# Altium PCB tuch-tara-btr.PcbDoc
Units mm, origin at the board's own origin, x right, y up, seen from the top; angles counter-clockwise.
Board outline 151 x 86.38 mm, 2 copper layers (Top Layer, Bottom Layer); 17 components, 13 nets, 42 pads, 0 vias.
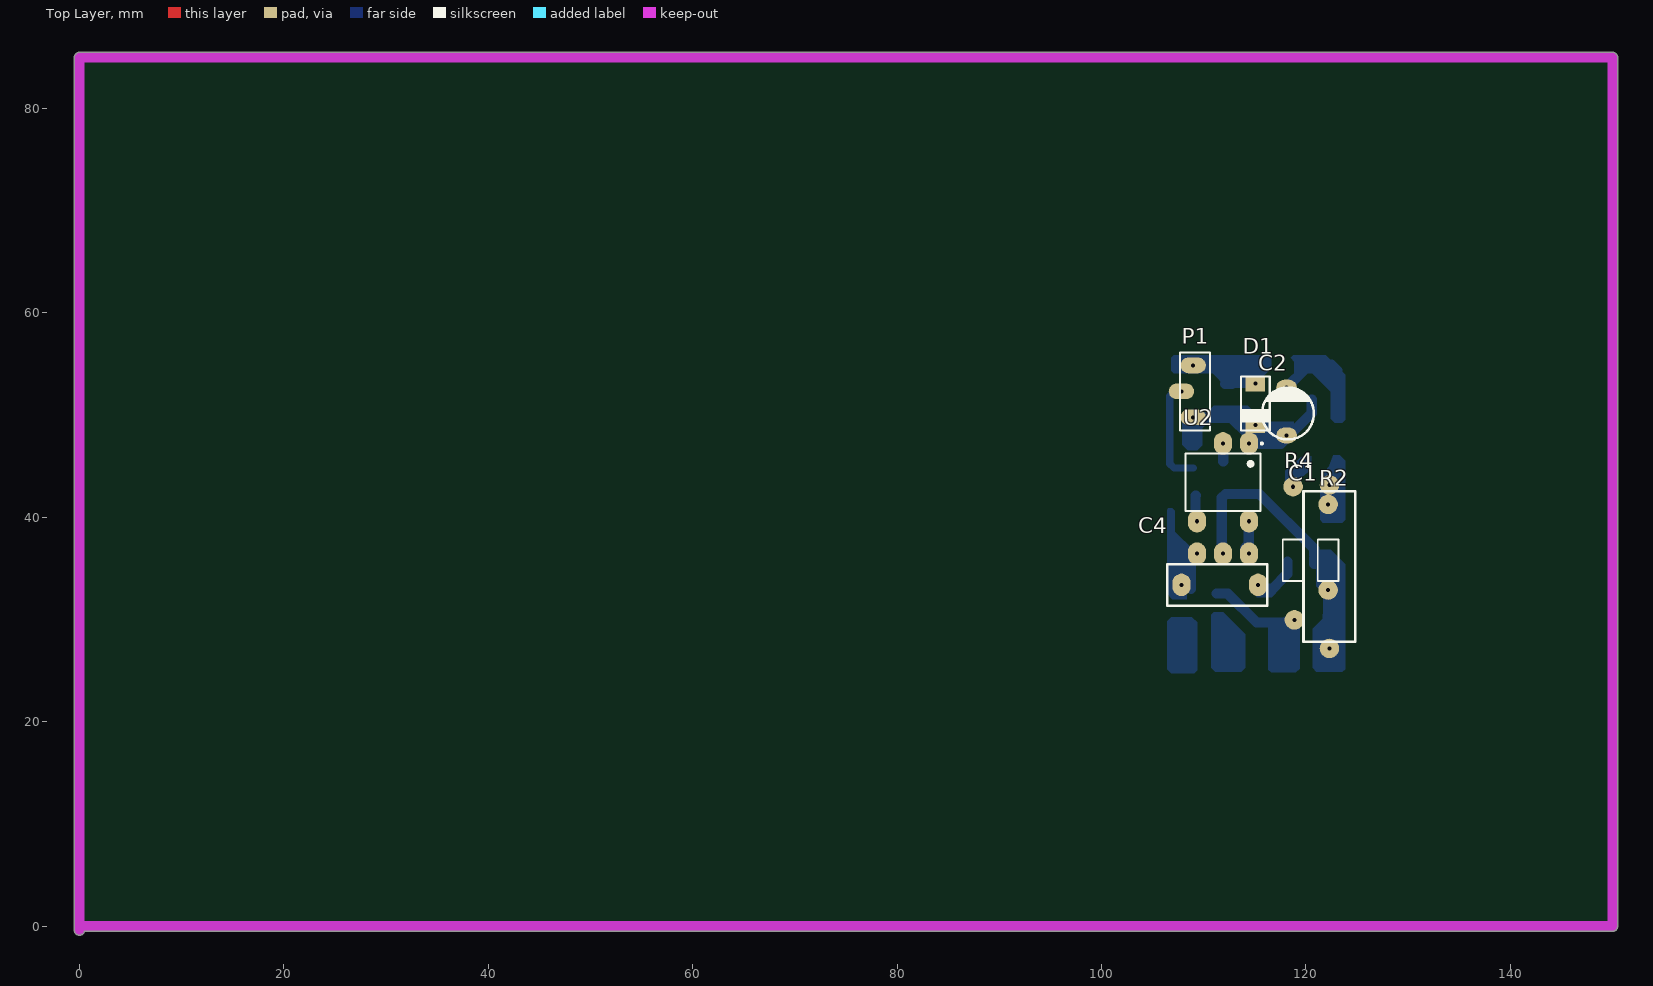
[diagram p0: Top Layer view]
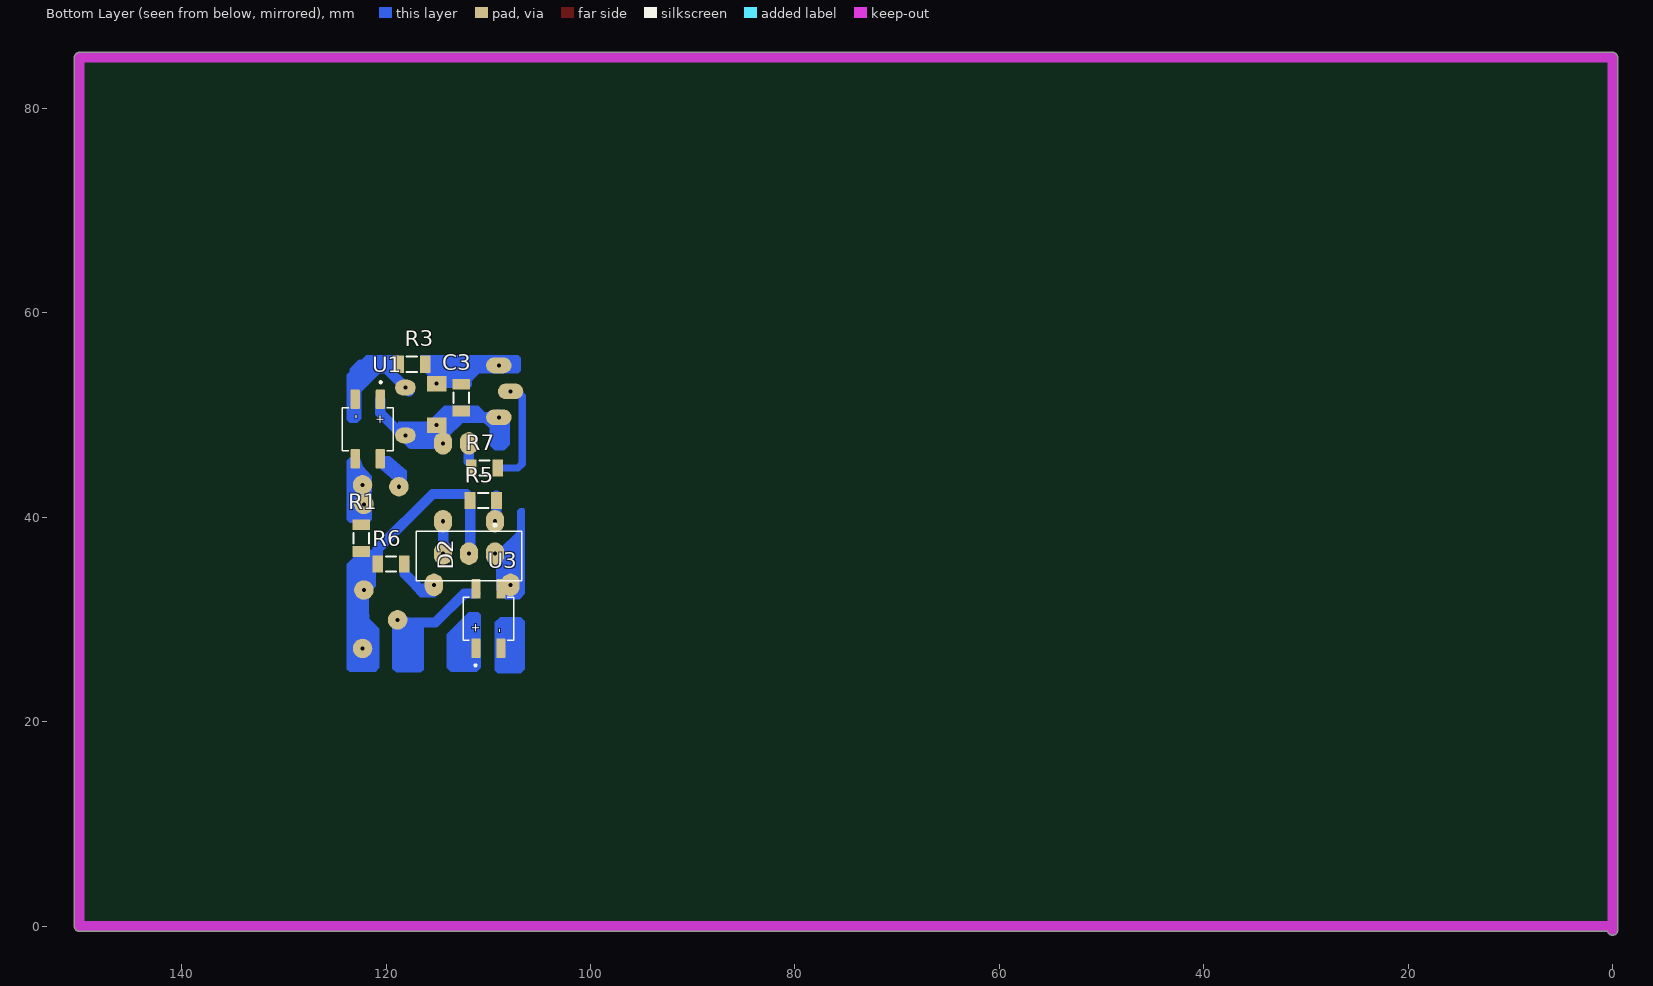
[diagram p1: Bottom Layer view, seen from below]
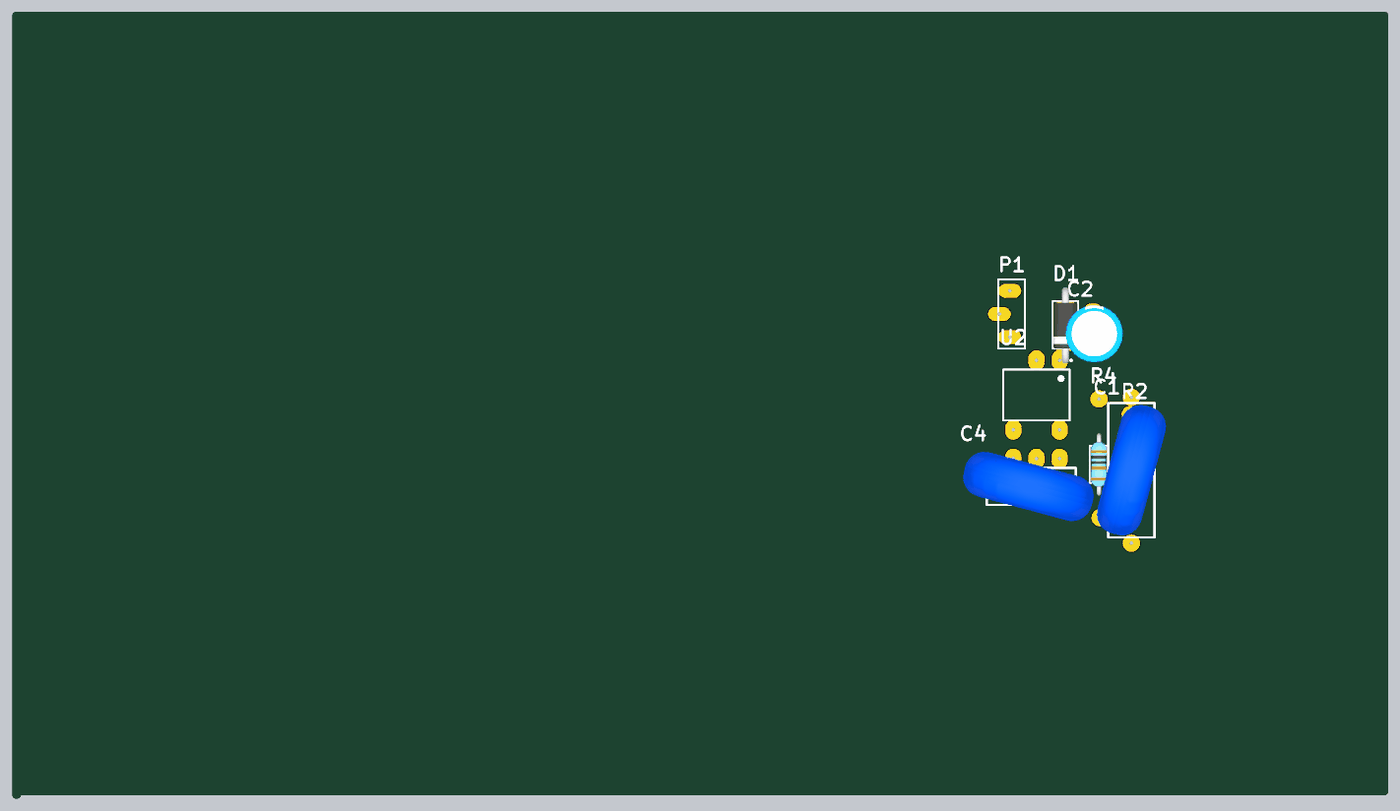
[diagram p2: 3D render of the assembled board from above, using the file's embedded part models]
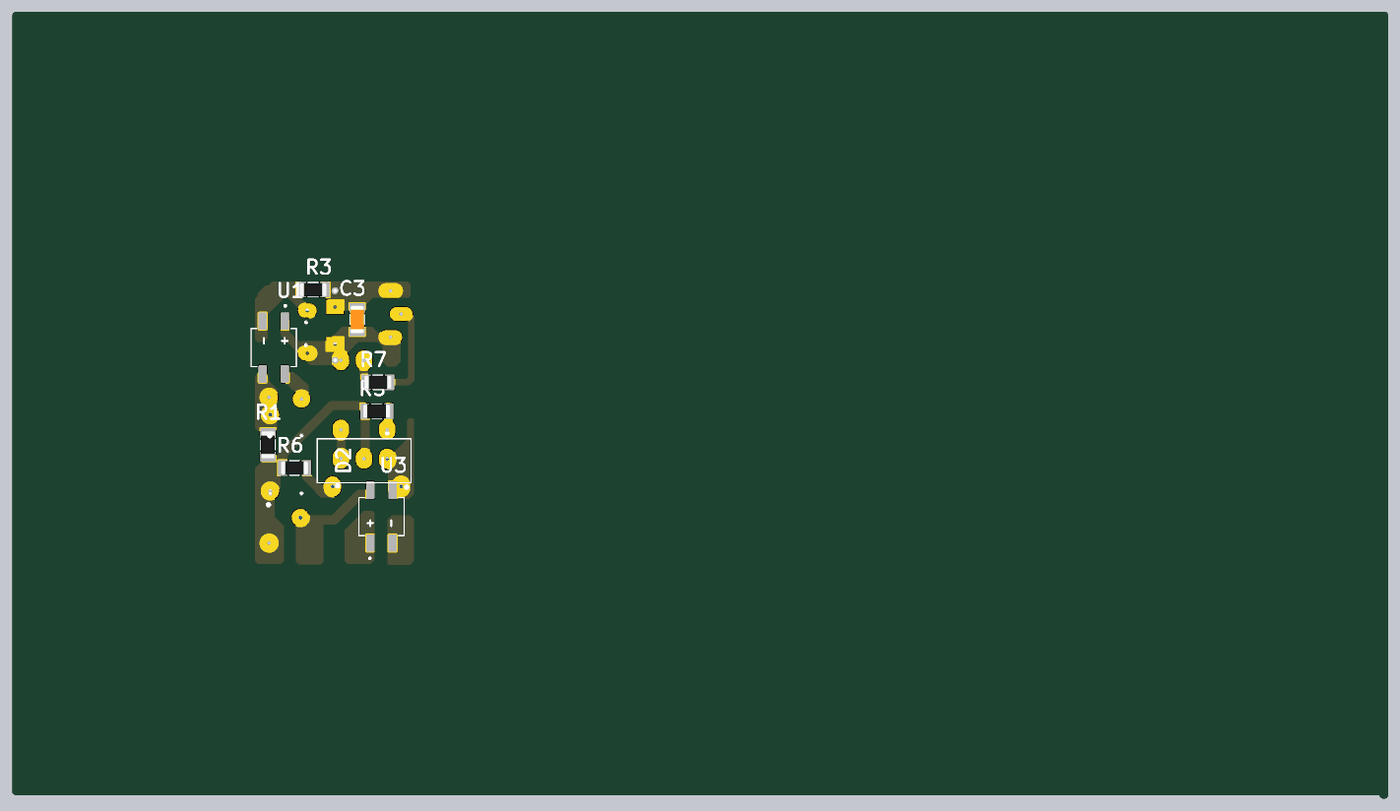
[diagram p3: 3D render of the assembled board from below, using the file's embedded part models]

## Layer stack, top to bottom
Top Solder: solder mask 0.0102, Solder Resist, Dk 3.5
Top Layer: signal copper 0.0356
Dielectric 1: dielectric 0.32, FR-4, Dk 4.8
Bottom Layer: signal copper 0.0356
Bottom Solder: solder mask 0.0102, Solder Resist, Dk 3.5

## Board outline
-0.5,-0.381 -0.5,85 cw(c0,85) 0,85.5 150,85.5 cw(c150,85) 150.5,85 150.5,0 cw(c150,0) 150,-0.5 0.486,-0.5 cw(c0,-0.381)

## Design rules (kind name [scope] priority, off if disabled: settings)
Clearance Clearance_1 [InPolygon] p1: gap=0.8 ignorepadtopadclearanceinfootprint=FALSE
Clearance [All] p2: gap=0.254 ignorepadtopadclearanceinfootprint=FALSE except(0: Arc-Hole Track-Hole SMDPad-Hole THPad-Hole Via-Hole Fill-Hole Poly-Hole Region-Hole Text-Hole)
PolygonConnect [All] p1: connectstyle=Relief reliefconductorwidth=0.254 reliefentries=4 polygonreliefangle="90 Angle" airgapwidth=0.254
RoomDefinition tuch-tara2 [InComponentClass('tuch-tara2')] p1: confinementstyle=ConfineIn formatcopy=TRUE lockcomponents=FALSE outline 144.907,-4.953 247.904,-4.953 247.904,23.114 144.907,23.114
RoutingLayers [All] p1: top layer_v5=FALSE bottom layer_v5=TRUE
RoutingVias [All] p1: holewidth=0.711 width=2.5 viastyle="Through Hole" minholewidth=0.711 minwidth=1.27 maxholewidth=0.711 maxwidth=2
SolderMaskExpansion [All] p1: expansion=0.102 istentingtop=FALSE
Width [All] p1: maxlimit=3 minlimit=0.5 preferedwidth=1
29 further rules are at their usual default settings.

## Components (designator, comment, footprint, x,y, rotation, side; value= is the part's Value field where it differs from the comment)
C1 "=Value" CAP-30#1 122.301,35.179 r90 top
C2 "=Value" ELEC-CAP-RAD10-20 118.237,50.165 r270 top
C3 "=Value" "CAP 1206" 112.649,51.689 r90 bottom
C4 "=Value" CAP-30#2 110.998,33.401 r0 top
D1 "MODEL" DO-41 115.062,54.864 r270 top
D2 "BTA16-600CW3G" *TO254P1028X482X1968-3 109.347,36.449 r0 bottom
P1 "Header 3" HDR1X3 108.966,54.864 r270 top
R1 "10K" "RES 1206 (3216X08L)" 122.428,37.973 r270 bottom
R2 "10K" Res-(1/4)#1 122.174,35.814 r270 top
R3 "10K" "RES 1206 (3216X08L)" 117.475,54.991 r0 bottom
R4 "10K" Res-(1/4)#2 118.745,35.814 r270 top
R5 "10K" "RES 1206 (3216X08L)" 110.49,41.656 r0 bottom
R6 "10K" "RES 1206 (3216X08L)" 119.507,35.433 r0 bottom
R7 "10K" "RES 1206 (3216X08L)" 110.363,44.831 r0 bottom
U1 "MB6S" SOIC245P670X270-4N 121.793,48.641 r270 bottom
U2 "K3021P" DIP762W50P254L730H410Q6 111.887,43.434 r270 top
U3 "MB6S" SOIC245P670X270-4N 109.982,30.099 r90 bottom

## Footprints (in the part's own frame and the unit in brackets; to place one, negate y for a bottom-side part, rotate by r counter-clockwise, add the part's x,y. Pads: shape width x height; smd on the part's side, far side on the other; paste and mask are expansions set on the pad)
*TO254P1028X482X1968-3 [mm]
  oval 1.8x2.2 hole 0.4: 1(0,0) 2(2.54,0) 3(5.08,0)
  silkscreen extent -2.6,-2.9 7.68,2.64
"CAP 1206" [mm]
  rect 1.05x1.7 smd: 1(-1.27,0) 2(1.326,0)
  silkscreen extent -0.47,-0.75 0.53,0.75, body extent -1.49,-0.77 1.55,0.75, height 0.75
CAP-30#1 [mm]
  round 1.905 hole 0.4: 1(-8.001,0) 2(8.001,0)
  silkscreen extent -7.37,-2.54 7.37,2.54, body extent -7.65,-4.29 7.65,4.29, height 17.96
CAP-30#2 [mm]
  oval 1.8x2.2 hole 0.4: 1(-3.175,0) 2(4.318,0)
  silkscreen extent -4.57,-2.03 5.21,2.03, body extent -7.65,-4.29 7.65,4.29, height 17.96
DIP762W50P254L730H410Q6 [mm]
  oval 2.2x1.79 hole 0.4: 1(-3.81,2.54) 2(-3.81,0) 4(3.81,-2.54) 6(3.81,2.54)
  silkscreen extent -3.9,-3.65 2.8,3.9
DO-41 [mm]
  rect 1.5x1.905 hole 0.4: 1(1.778,0) 2(5.842,0)
  silkscreen extent 1.1,-1.5 6.35,1.5, body extent -0.41,-1.33 8,1.33, height 3.33
ELEC-CAP-RAD10-20 [mil]
  oval 60x80 hole 15.75: 1(-100,-5) 2(84.65,-5)
  silkscreen extent -100,-100 100,100, body extent -124,-124 124,124, height 404
HDR1X3 [mm] "Connector; Header; 3 Position"
  oval 1.524x2.5 hole 0.4: 1(0,0) 2(2.54,-1.143) 3(5.08,0)
  silkscreen extent -1.27,-1.27 6.35,1.65
"RES 1206 (3216X08L)" [mm] "Chip Resistor, 2-Leads, Body 3.2x1.6mm, IPC High Density _ (0.125 W)"
  rect 1.05x1.7 smd: 1(-1.295,0) 2(1.301,0)
  silkscreen extent -0.5,-0.75 0.5,0.75, body extent -1.52,-0.76 1.53,0.76, height 0.6
Res-(1/4)#1 [mm]
  round 1.905 hole 0.4: 1(-5.461,0) 2(2.921,0)
  silkscreen extent -2.03,-1.02 2.03,1.02, body extent -3.43,-0.93 3.43,0.91, height 2.92
Res-(1/4)#2 [mm]
  round 1.905 hole 0.4: 1(-7.186,0) 2(5.842,0.127)
  silkscreen extent -2.03,-1.02 2.03,1.02, body extent -3.43,-0.93 3.43,0.91, height 2.92
SOIC245P670X270-4N [mm]
  rrect23% 1.91x0.91 smd: 1(-2.9,1.225) 2(-2.9,-1.225) 3(2.9,-1.225) 4(2.9,1.225)
  silkscreen extent -4.68,-2.48 2.1,2.48

## Part data
C1 C3 C4: library part Capacitor, "Capacitor"
C2: library part "Capacitor Electrolytic", "Electrolytic Capacitor"
D1: library part Diode, "Diode", MODEL=1N4148
D2: "TRIAC Standard 600V 16A Through Hole TO-220AB", Package="TO-220 ON Semiconductor", Arrow_Americas-Purchase-URL=https://snapeda.com/shop?store=Arrow+Americas&id=390940, Availability=Unavailable, DigiKey-Purchase-URL=https://snapeda.com/shop?store=DigiKey&id=390940, MF="Littelfuse Inc.", Mouser-Purchase-URL=https://snapeda.com/shop?store=Mouser&id=390940, MP=BTA16-600CW3G, Price=None, SnapEDA_Link=https://www.snapeda.com/parts/BTA16-600CW3G/Littelfuse%20Inc./view-part/390940/?ref=snap
P1: "Header, 3-Pin", LatestRevisionDate=17-Jul-2002, LatestRevisionNote="Re-released for DXP Platform.", Publisher="Altium Limited"
R1 R2 R3 R4 R5 R6 R7: library part Resistor, "Resistor", Power="1/4 W", Tolerance=5%
U1 U3: "Bridge Rectifier Single Phase Standard 600V Surface Mount 4-SOIC", Package="BESOP-4 Surge Components", Digi-Key_Part_Number=MB6SCT-ND, Digi-Key_Purchase_URL=https://www.digikey.com.tr/product-detail/en/on-semiconductor/MB6S/MB6SCT-ND/965654?utm_source=snapeda&utm_medium=aggregator&utm_campaign=symbol, MF="ON Semiconductor", MP=MB6S, SnapEDA_Link=https://www.snapeda.com/parts/MB6S/ON%20Semiconductor/view-part/2774209/?ref=snap
U2: "Optoisolator Triac Output 5300Vrms 1 Channel 6-DIP", Package="DIP-6 Vishay", Availability=Unavailable, DigiKey-Purchase-URL=https://snapeda.com/shop?store=DigiKey&id=291595, MF="Vishay Semiconductor", Mouser-Purchase-URL=https://snapeda.com/shop?store=Mouser&id=291595, MP=K3021P, Price=None, SnapEDA_Link=https://www.snapeda.com/parts/K3021P/Vishay%20Semiconductor%20Opto%20Division/view-part/291595/?ref=snap

## Nets (pads, with @x,y where several pads share a name; then routed paths per layer and width w, separated by ;. In a path a pad name is that pad's centre, name@x,y a point inside that pad or via, vN(x,y) a via of type N, cw(c..) or ccw(c..) an arc to the next point about the centre after c; other vN are vias at no path point)
faz: C1.1 D2.2 R1.2 R2.2 R5.2 R6.2 | length 27.5
  Bottom Layer w1: R5.2@111.766,41.916 112.141,42.291 115.443,42.291 120.808,36.926 120.808,36.342 ; R5.2 111.766,41.631 111.766,40.963 111.76,40.958 111.76,37.246 111.76,36.576 D2.2 ; R6.2 R6.2@120.808,35.961 ; 121.011,36.342 122.682,34.671 122.682,34.475 122.347,34.14 122.347,33.066 R2.2 ; R2.2@122.174,32.512 122.174,27.305 C1.1
GND: C2.1 R3.2 U1.2 | length 10
  Bottom Layer w1: C2.1@117.729,52.324 120.365,54.96 122.477,54.96 123.063,54.374 U1.2@123.063,50.994
NetC1_2: C1.2 R1.1 R2.1 U1.3 | length 2
  Bottom Layer w1: R2.1 122.237,41.338 122.237,43.116 C1.2
NetC3_2: C3.2 D1.1 P1.1 R3.1 | length 4.3
  Bottom Layer w1: C3.2@112.113,53.04 C3.2@112.618,53.04 ; C3.2@112.745,53.04 113.172,53.467 D1.1@114.173,53.467 ; D1.1@114.404,53.596 115.449,54.641 115.774,54.641 115.799,54.666 R3.1@115.799,54.991
NetC4_1: C4.1 D2.1 U3.3 | length 3.7
  Bottom Layer w1: U3.3 108.757,35.443 109.347,36.033 D2.1
NetC4_2: C4.2 R6.1 | length 5.3
  Bottom Layer w1: C4.2@115.715,33.51 C4.2@116.194,33.031 ; R6.1@118.187,35.687 118.187,34.494 116.724,33.031 C4.2@116.194,33.031 ; C4.2@116.194,33.031 115.789,33.031 115.778,33.02 116.205,33.02 C4.2@116.194,33.031
NetD2_3: D2.3 U2.6 | length 2.2
  Bottom Layer w1: D2.3@114.065,37.011 114.407,37.353 U2.6@114.407,39.089
NetR4_1: R4.1 U1.4
NetR5_1: R5.1 U2.4 | length 2.1
  Bottom Layer w1: U2.4@109.22,40.005 109.207,40.018 109.207,42.121 R5.1@109.22,42.133
NetR7_2: R7.2 U2.2 | length 1.8
  Bottom Layer w1: U2.2 111.902,47.229 111.902,45.481 R7.2@111.918,45.466
nol: R4.2 U3.4 | length 8.9
  Bottom Layer w1: U3.4@111.252,32.544 112.363,32.544 115.189,29.718 117.978,29.718 118.059,29.799 118.699,29.799 R4.2
o1: P1.2 R7.1 | length 11.2
  Bottom Layer w0.7: P1.2@108.554,52.293 107.09,52.293 106.68,51.883 106.68,45.241 107.09,44.831 R7.1@108.997,44.831
VCC: C2.2 C3.1 D1.2 P1.3 U1.1 U2.1 | length 5.6
  Bottom Layer w1: 117.546,47.188 120.568,50.21 U1.1
pads on no net: U3.1 U3.2

## Polygon pours and split planes (outlines as drawn)
NetC3_2 on Bottom Layer "NETC3_2_L02_P002" (solid, pour order 2): 116.332,39.751
no net on Bottom Layer "NONET_L02_P000" (solid, pour order 0): 91.059,37.973

## Keep-outs
Keep-Out Layer:
  lines w1: 0,-0.381 0,85 150,85 150,0 0,0

## Other copper
Bottom Layer:
  region net NetC4_1: 108.966,36.83 107.188,38.608 107.188,40.64 106.934,40.894 106.553,40.894 106.426,40.767 106.426,32.512 106.934,32.004 108.331,32.004 108.331,32.512 109.22,33.401 109.22,36.703
  region net VCC: 110.617,49.466 109.855,48.704 109.855,47.053 109.347,46.545 108.458,46.545 107.886,47.117 107.886,49.784 108.712,50.546 109.22,50.546
  region net GND: 121.285,53.975 121.158,54.102 118.872,54.102 118.872,55.245 118.491,55.626 118.745,55.88 121.92,55.88 122.682,55.118
  region net VCC: 110.363,50.292 110.998,50.927 114.3,50.927 115.867,49.36 118.829,49.36 118.829,48.09 117.475,46.736 114.046,46.736 113.919,46.863 113.919,47.879 112.522,49.276 109.22,49.276 109.22,50.038 108.712,50.546
  region net NetC3_2: 116.586,55.88 107.061,55.88 106.807,55.626 106.807,54.356 107.061,54.102 110.871,54.102 112.268,52.705 114.681,52.705 116.586,54.61
  region: 110.744,30.226 110.744,30.48 110.998,30.734 111.887,30.734 114.046,28.575 114.046,27.813
  region: 110.49,23.622
  region: 108.839,30.226 106.807,30.226 106.426,29.845 106.426,25.146 106.807,24.765 109.093,24.765 109.347,25.019 109.347,29.718
  region: 110.744,30.48 114.046,27.813 114.046,25.273 113.665,24.892 111.125,24.892 110.744,25.273
  region net faz: 121.031,36.83 121.031,33.274 122.174,32.131 122.174,31.559 122.492,31.242 123.825,31.242 123.825,33.147 123.825,35.433 122.428,36.83
  region net NetC1_2: 123.273,46.081 123.825,45.53 123.825,39.751 123.571,39.497 121.666,39.497 121.412,39.751 121.412,44.027
  region: 123.444,44.45
  region net GND: 119.106,55.626 122.174,55.626 123.825,53.975 123.825,49.53 123.571,49.276 122.809,49.276 122.428,49.657 122.428,52.304
  region net NetC4_2: 115.189,32.183 116.663,32.183 117.492,33.082 115.715,33.51 114.667,33.51
  region net NetR4_1: 120.523,45.974 120.523,44.704 117.983,42.545 117.983,44.54 119.654,45.974
  region net NetC1_2: 122.682,46.101 121.666,43.307 121.412,43.053 121.412,41.275 122.047,40.64 122.428,40.64 122.428,40.767 123.667,45.751 123.317,46.101
  region net nol: 116.692,30.162 116.332,29.803 116.332,25.083 116.586,24.828 118.999,24.828 119.38,25.209 119.38,29.909 119.126,30.162
  region net faz: 121.666,30.48 121.666,30.099 120.65,29.083 120.65,25.273 121.031,24.892 123.571,24.892 123.825,25.146 123.825,31.496 122.682,32.639

## Text inside footprints (layer, text, board x,y; h text height)
U1: Bottom Overlay "+" at 120.903,50.04 h0.81 r90; Bottom Overlay "-" at 123.193,50.041 h0.81 r90
U3: Bottom Overlay "-" at 108.582,28.699 h0.81 r270; Bottom Overlay "+" at 110.872,28.7 h0.81 r270